# Altium PCB Pcb_2layer_8x4_Template_NoCenterHoles.PcbDoc
Units mm, origin at the board's own origin, x right, y up, seen from the top; angles counter-clockwise.
Board outline 205.99 x 101.85 mm, 2 copper layers (Top Layer, Bottom Layer); 17 components, 29 nets, 74 pads, 0 vias.
Unrouted connection lines stored in the file: 16.
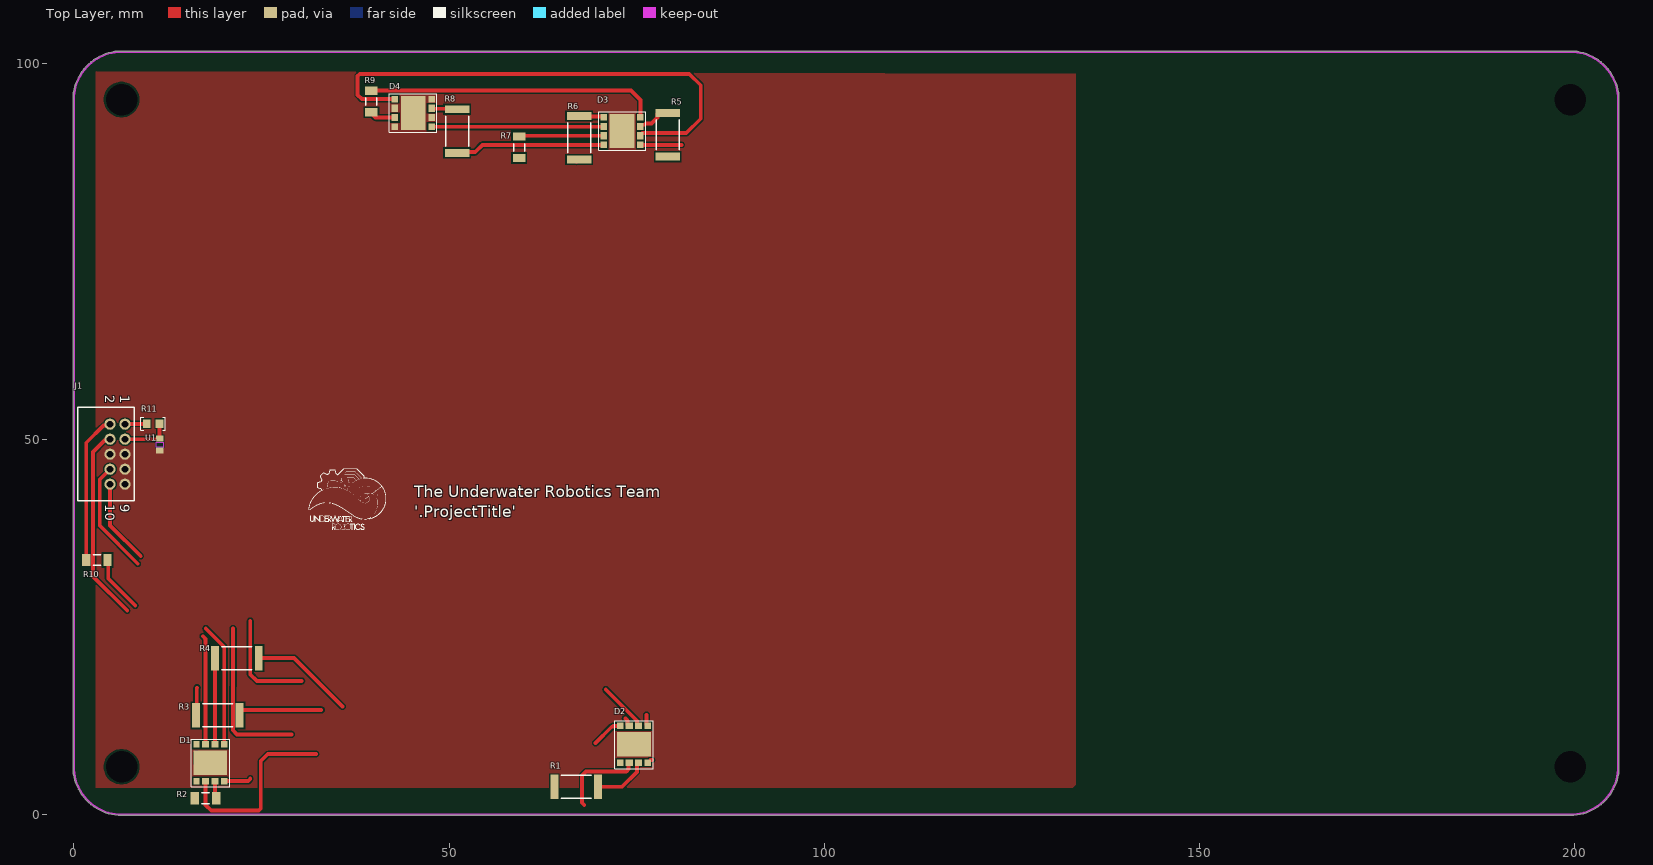
[diagram p0: Top Layer view]
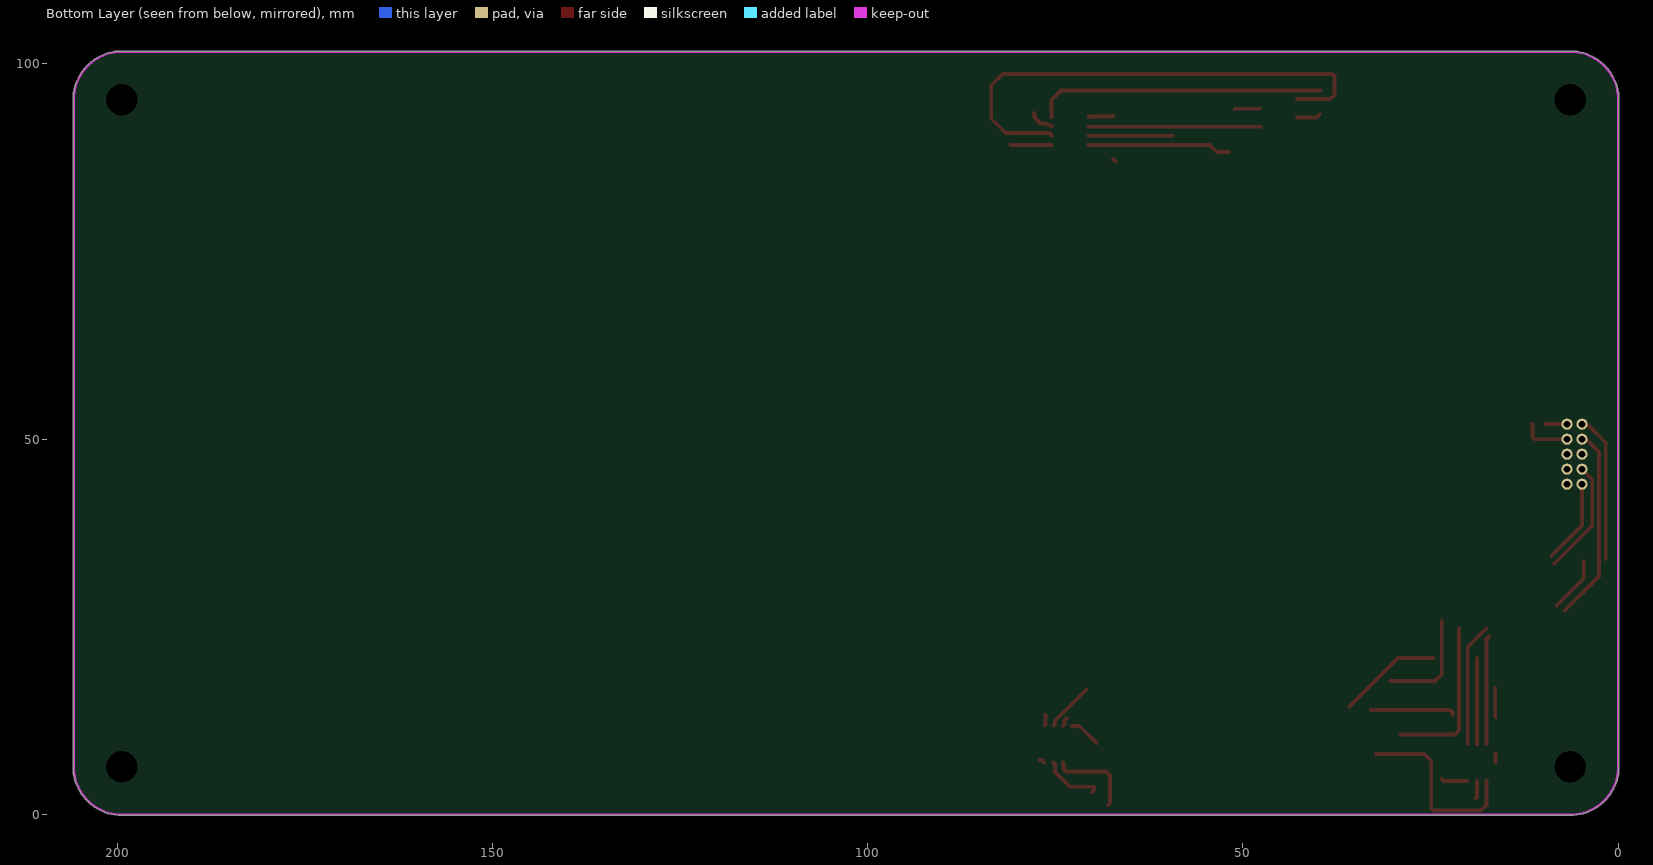
[diagram p1: Bottom Layer view, seen from below]

## Layer stack, top to bottom
Top Solder: solder mask 0.0102, Solder Resist, Dk 3.5
Top Layer: signal copper 0.0356
Dielectric 1: dielectric 0.32, FR-4, Dk 4.8
Bottom Layer: signal copper 0.0356
Bottom Solder: solder mask 0.0102, Solder Resist, Dk 3.5

## Board outline
6.35,-0.127 cw(c6.35,6.35) -0.127,6.35 -0.127,95.25 cw(c6.35,95.25) 6.35,101.727 199.39,101.727 cw(c199.39,95.25) 205.867,95.25 205.867,6.35 cw(c199.39,6.35) 199.39,-0.127

## Design rules (kind name [scope] priority, off if disabled: settings)
AcuteAngle [All] p1: minimum=6.00000000000000E+0001 checktracksonly=FALSE
BoardOutlineClearance "BoardOutlineClearance JLCPCB" [All] p1: gap=0.2 ignorepadtopadclearanceinfootprint=FALSE
Clearance "Clearance JLCPCB 4 layer" [All] p1: gap=0.2 ignorepadtopadclearanceinfootprint=FALSE except(0.09: Arc-Arc Arc-Track Track-Track; 0.127: Arc-SMDPad Track-SMDPad SMDPad-SMDPad; 0.254: Arc-Hole Track-Hole SMDPad-Hole THPad-Hole Via-Hole Fill-Hole Poly-Hole Region-Hole Text-Hole)
DiffPairsRouting [All] p1: maxlimit=0.254 minlimit=0.152 mostfreqgap=0.203 toplayer_minwidth=0.09 toplayer_maxwidth=0.381 toplayer_prefwidth=0.203 bottomlayer_minwidth=0.09 bottomlayer_maxwidth=0.381 bottomlayer_prefwidth=0.203 maxuncoupledlength=12.7
HoleSize "HoleSize JLCPCB Pad" [IsPad] p1: absolutevalues=TRUE maxlimit=6.3 minlimit=0.5 maxpercent=80.000 minpercent=20.000
HoleSize "HoleSize JLCPCB 4 layer" [All] p2: absolutevalues=TRUE maxlimit=6.3 minlimit=0.2 maxpercent=80.000 minpercent=20.000
HoleToHoleClearance "HoleToHoleClearance JLCPCB" [All] p1: gap=0.254 allowstackedmicrovias=TRUE
MinimumAnnularRing "MinimumAnnularRing JLCPCB Pad" [IsPad] p1: minimumring=0.3
MinimumAnnularRing "MinimumAnnularRing JLCPCB 1oz" [All] p2: minimumring=0.13
MinimumSolderMaskSliver [All] p1: minsoldermaskwidth=0.025
PlaneConnect [All] p1: pad.planeconnectstyle=Relief pad.reliefexpansion=0.508 pad.reliefentries=4 pad.reliefconductorwidth=0.254 pad.reliefairgap=0.254 via.planeconnectstyle=Direct via.reliefexpansion=0.508 via.reliefentries=4 via.reliefconductorwidth=0.254 via.reliefairgap=0.254
PolygonConnect [All] p1: connectstyle=Direct reliefconductorwidth=0.381 reliefentries=4 polygonreliefangle="45 Angle" airgapwidth=0.254
RoutingVias "RoutingVias JLCPCB 4 layer" [All] p1: holewidth=0.5 width=1 viastyle="Through Hole" minholewidth=0.2 minwidth=0.4 maxholewidth=1.27 maxwidth=2.032
SilkToSilkClearance [All] p1: silktosilkclearance=0.076
SilkToSolderMaskClearance "SilkToSolderMaskClearance JLCPCB" [IsPad] p1: minsilkscreentomaskgap=0.15 clearancetoexposedcopper=TRUE
SolderMaskExpansion "SolderMaskExpansion JLCPCB" [All] p1: expansion=0.05 istentingtop=FALSE
Width "Width JLCPCB 4 layer" [All] p1: maxlimit=5 minlimit=0.09 preferedwidth=0.508 bottomlayer_prefwidth=0.25 minimp=50.000000 maximp=50.000000 favimp=50.000000
23 further rules are at their usual default settings.

## Components (designator, comment, footprint, x,y, rotation, side; value= is the part's Value field where it differs from the comment)
D1 "LE_RTDUW_S2WM" LE_RTDUW_S2WM 18.171,6.896 r0 top
D2 "LE_RTDUW_S2WM" LE_RTDUW_S2WM 74.615,9.36 r0 top
D3 "LE_RTDUW_S2WM" LE_RTDUW_S2WM 73.025,91.059 r90 top
D4 "LE_RTDUW_S2WM" LE_RTDUW_S2WM 45.212,93.472 r270 top
J1 "10pos 3.8A conn" SAMTEC-LS2-105-01-X-D-RA2 8.997,55.245 r270 top
R1 "Jumper 2512(6432)" RESC2512(6432)_L 66.908,3.683 r180 top value="0.00 Ohm"
R2 "ERJ-8GEY0R00V" RESC3216X70X50NL05T20 17.526,2.159 r0 top
R3 "Jumper 2512(6432)" RESC2512(6432)_L 19.177,13.208 r0 top value="0.00 Ohm"
R4 "Jumper 2512(6432)" RESC2512(6432)_L 21.717,20.828 r0 top value="0.00 Ohm"
R5 "Jumper 2512(6432)" RESC2512(6432)_L 79.121,90.551 r270 top value="0.00 Ohm"
R6 "Jumper 2512(6432)" RESC2512(6432)_L 67.31,90.17 r90 top value="0.00 Ohm"
R7 "ERJ-8GEY0R00V" RESC3216X70X50NL05T20 59.309,88.9 r90 top
R8 "Jumper 2512(6432)" RESC2512(6432)_L 51.054,91.059 r90 top value="0.00 Ohm"
R9 "ERJ-8GEY0R00V" RESC3216X70X50NL05T20 39.624,94.996 r90 top
R10 "ERJ-8GEY0R00V" RESC3216X70X50NL05T20 3.048,33.909 r0 top
R11 "10k Ohm 0.5% 1/10W" RESISTOR_0603 10.541,52.07 r180 top
U1 "NTCS0603E3223FMT" NTCS0603_VIS 11.43,49.276 r270 top

## Footprints (in the part's own frame and the unit in brackets; to place one, negate y for a bottom-side part, rotate by r counter-clockwise, add the part's x,y. Pads: shape width x height; smd on the part's side, far side on the other; paste and mask are expansions set on the pad)
LE_RTDUW_S2WM [mil]
  rect 33.5x33.5 smd: 1(72.6,-96.5) 4(-72.6,-96.5) 5(-72.6,96.5) 8(72.6,96.5)
  rect 37.4x33.5 smd: 2(24.6,-96.5) 3(-24.6,-96.5) 6(-24.6,96.5) 7(24.6,96.5)
  rect 177.17x129.92 smd: 9(0,0)
  silkscreen extent -101,-125 101,123, body extent -93,-113 91,113, height 52
NTCS0603_VIS [mm]
  rect 0.8x1 smd paste+0 mask+0: 1(-0.8,0) 2(0.8,0)
  Top Layer keep-out region: -0.349,-0.449 -0.349,0.449 0.349,0.449 0.349,-0.449
  body extent -0.88,-0.47 0.88,0.47, height 0.94
RESC2512(6432)_L [mm] "Chip Resistor, Body 6.4x3.2mm, IPC High Density"
  rect 1.05x3.25 smd: 1(-2.9,0) 2(2.9,0)
  silkscreen extent -2,-1.52 2,1.53, body extent -3.25,-1.7 3.25,1.7, height 0.75
RESC3216X70X50NL05T20 [mm] "Chip Resistor, 2-Leads, Body 3.20x1.60mm, IPC Medium Density"
  rect 1.1x1.65 smd: 1(-1.425,0) 2(1.425,0)
  silkscreen extent -0.5,-0.72 0.5,0.72, body extent -1.63,-0.82 1.62,0.82, height 0.7
RESISTOR_0603 [mil] "Resistor 0603"
  rect 40x45 smd: 1(-33.5,0) 2(33.5,0)
  silkscreen extent -65,-35 65,35, body extent -31,-16 32,16, height 16
SAMTEC-LS2-105-01-X-D-RA2 [mm]
  round 1.49 hole 0.89 mask+0: 1(3.239,-2.191) 2(3.239,-4.191) 3(5.239,-2.191) 4(5.239,-4.191) 5(7.239,-2.191) 6(7.239,-4.191) 7(9.239,-2.191) 8(9.239,-4.191) 9(11.239,-2.191) 10(11.239,-4.191)
  silkscreen extent 1.01,-8.51 13.47,-0.99

## Part data
D1 D2 D3 D4: "LED OSTAR RGBW 625/527/453NM SMD", Supplier Part Number 1=720-LERTDUWS2WMA2120, Supplier 1=Mouser
J1: library part SAMTEC-LS2-105-01-X-D-RA2, "10 Position Connector Self Mating, Non-Gendered, Hermaphroditic Through Hole, Right Angle Gold", Package=None, Supplier Part Number 1=200-LS210501FDRA2, Availability=Unavailable, MP=SAMTEC-LS2-105-01-X-D-RA2, Price=None, Supplier 1=Mouser
R1 R3 R4 R5 R6 R8: library part CMP-1018-00001-1, "Jumper 2512 (6432 Metric)", Case-EIA=2512, Case-Metric=6432, Power=None, Technology=SMT, Tolerance=None
R2 R7 R9 R10: library part CMP-2003-00541-1, Manufacturer=Panasonic, Part Number=ERJ-8GEY0R00V
R11: library part RESISTOR_10K_0.5%_0603, "RES 10k OHM 0.5% 1/10W 0603", Digikey Part Numer=CR0603-JW-104ELFTR-ND, Supplier Part Number 1=749-1695-1-ND, Tolerance="+/- 0.5%", Value  (Ohms)=10K, Made By="Robert Pafford", Supplier=Digikey, Supplier 1=Digi-Key, Wattage=1/10W
U1: library part CMP-00030-42631939-1, "NTCS0603E3223FMT Thermistor NTC 22K Ohm 1% 2-Pin 0603 Surface Mount Solder Pad 3730K -4.5 to -4 T/R Automotive", Case Code (Imperial)=0603, Case Code (Metric)=1608, Max Operating Temperature=150°C, Min Operating Temperature=-40°C, Power Dissipation=125mW, Resistance=22kΩ, Tolerance=1%, Accuracy=1%, Case/Package=0603, Contact Plating=Tin, Depth=800µm, Height=800µm, Length=1.6mm, Mount="Surface Mount", NexarPartId=42631939, Number of Pins=2, Power Rating=125mW, Radiation Hardening=No, REACH SVHC=Unknown, RoHS=Compliant, Schedule B="8533400080, 8533400080", Termination=SMD/SMT, Width=1.6mm

## Free pads (board coordinates)
  round 1.524 hole 4.191: 1(6.35,6.35) 1(6.35,95.25) 1(199.39,6.35) 1(199.39,95.25)

## Nets (pads, with @x,y where several pads share a name; then routed paths per layer and width w, separated by ;. In a path a pad name is that pad's centre, name@x,y a point inside that pad or via, vN(x,y) a via of type N, cw(c..) or ccw(c..) an arc to the next point about the centre after c; other vN are vias at no path point)
3V3: J1.1 R11.2 | length 2.9
  Top Layer w0.508: J1.1 6.838,52.038 9.658,52.038 R11.2
"Blue Anode": D1.6 J1.8 | length 29.8
  Top Layer w0.508: J1.8 3.429,44.629 3.429,38.481 8.509,33.401 ; 17.199,23.749 17.546,23.402 D1.6
"Blue D1D2": D2.6 R3.2 | length 12.7
  Top Layer w0.508: R3.2 22.077,13.668 22.348,13.939 32.959,13.939 ; 73.472,12.796 73.769,12.499 73.769,11.982 73.941,11.811 D2.6
"Blue D2D3": D3.6 R7.2 | length 11.3
  Top Layer w0.508: R7.2@59.309,90.434 D3.6
"Blue D3D4": D4.6 R8.2 | length 3.4
  Top Layer w0.508: D4.6 47.732,94.028 50.985,94.028 R8.2
GND: D1.9 D2.9 D3.9 D4.1 D4.3 D4.5 D4.7 D4.9 J1.5 J1.6 J1.7 J1.9 U1.2
"Green Anode": J1.2 R10.1 | length 19.7
  Top Layer w0.508: R10.1@1.645,34.036 1.645,49.524 3.939,51.818 4.618,51.818 J1.2
"Green D1D2": D1.3 D2.4 | length 25
  Top Layer w0.508: D1.3 17.546,1.25 18.288,0.508 24.594,0.508 24.892,0.806 24.892,7.112 25.832,8.052 32.258,8.052
"Green D2D3": D2.3 D3.4 | length 17
  Top Layer w0.508: 67.989,1.27 67.691,1.568 67.691,5.207 68.226,5.742 73.6,5.742 73.898,6.039 73.898,6.866 D2.3@73.941,6.909 ; D3.4 80.965,89.215
"Green D3D4": D3.3 D4.4 | length 67.6
  Top Layer w0.508: D4.4 38.365,95.316 37.796,95.885 37.796,98.381 38.094,98.679 81.992,98.679 83.516,97.155 83.516,92.71 81.589,90.782 75.775,90.782 75.476,90.484 D3.3
NetD1_1: D1.1 R1.2 | length 3.6
  Top Layer w0.508: D1.1@20.095,4.445 23.224,4.445 23.495,4.716 23.495,4.826
NetD1_2: D1.2 R2.2 | length 2.4
  Top Layer w0.508: D1.2@18.786,4.445 18.786,2.324 R2.2
NetD1_4: D1.4 R10.2 | length 8.5
  Top Layer w0.508: R10.2@4.572,33.782 4.572,31.439 8.163,27.848 ; 16.327,6.929 16.327,8.052
NetD1_5: D1.5 R3.1 | length 4
  Top Layer w0.508: R3.1@16.327,12.954 16.366,12.992 16.366,16.853 16.404,16.891
NetD1_7: D1.7 R4.1 | length 11.5
  Top Layer w0.508: D1.7@18.807,9.347 18.807,20.817 R4.1
NetD2_1: D2.1 R5.2 | length 0.7
  Top Layer w0.508: D2.1 76.808,7.257 77.051,7.257
NetD2_5: D2.5 R7.1 | length 25.8
  Top Layer w0.508: 21.209,24.765 21.209,17.061 21.171,17.023 21.171,11.214 21.717,10.668 28.988,10.668 ; 69.501,9.525 71.66,11.684 71.804,11.684 71.895,11.775 72.735,11.775 D2.5
NetD2_7: D2.7 R6.1 | length 21.4
  Top Layer w0.508: 23.495,25.781 23.495,18.669 24.384,17.78 30.353,17.78 ; R6.1@66.977,86.999 67.248,87.27 R6.1 ; 70.866,16.637 75.019,12.484 75.019,11.982 D2.7@75.19,11.811
NetD3_1: D3.1 R9.2 | length 38.7
  Top Layer w0.508: R9.2@39.624,96.449 74.239,96.449 75.476,95.212 D3.1
NetD3_5: D3.5 R8.1 | length 19.2
  Top Layer w0.508: R8.1@51.816,88.265 53.467,88.265 54.417,89.215 D3.5
"Red Anode": J1.4 R2.1 | length 26
  Top Layer w0.508: J1.4 4.618,49.818 4.085,49.818 2.554,48.287 2.554,31.712 7.1,27.166
"Red D1D2": D2.2 R1.1 | length 8.2
  Top Layer w0.508: R1.1 69.808,3.24 R1.1@70.079,2.969 ; R1.1@69.829,3.683 73.025,3.683 75.019,5.677 75.019,6.737 75.19,6.909 D2.2
"Red D2D3": D3.2 R5.1 | length 3.4
  Top Layer w0.508: D3.2 75.476,91.733 75.648,91.905 76.03,91.905 76.2,92.075 76.962,92.075 77.75,92.863 77.75,93.371 R5.1@77.851,93.472
"Red D3D4": D4.2 R9.1 | length 3.2
  Top Layer w0.508: R9.1@39.751,93.275 40.179,92.847 D4.2
Temp: J1.3 R11.1 U1.1 | length 6.5
  Top Layer w0.508: J1.3 11.094,50.006 11.392,50.304 R11.1
"White Anode": D1.8 J1.10 | length 27.7
  Top Layer w0.508: J1.10 4.806,38.501 8.89,34.417 ; 17.569,24.765 20.015,22.319 D1.8
"White D1D2": D2.8 R4.2 | length 15.3
  Top Layer w0.508: R4.2 29.337,20.828 35.775,14.39 ; 76.288,13.247 76.288,11.982 D2.8
"White D2D3": D3.8 R6.2 | length 3.3
  Top Layer w0.508: R6.2 67.393,92.987 69.716,92.987 70.49,92.987 D3.8
"White D3D4": D3.7 D4.8 | length 22.9
  Top Layer w0.508: D4.8@47.625,91.628 D3.7@70.574,91.628

## Polygon pours and split planes (outlines as drawn)
GND on Top Layer "GND_L01_P000" (solid, remove dead copper, pour order 0): 2.921,99.06 2.921,3.556 133.096,3.556 133.477,3.937 133.477,98.679

## Keep-outs
Keep-Out Layer:
  lines w0.254: 95.25,0 6.35,0 ; 6.35,0 cw(c6.35,6.35) 0,6.35 0,95.25 cw(c6.35,95.25) 6.35,101.6 199.39,101.6 cw(c199.39,95.25) 205.74,95.25 205.74,6.35 cw(c199.39,6.35) 199.39,0 6.35,0

## Silkscreen, mask and mechanical layers (free items; w line width, h text height)
Top Overlay:
  drawing of 19 lines, arcs and shapes, not listed
  text "The Underwater Robotics Team" at 45.339,42.291 h1.52
  text "'.ProjectTitle'" at 45.339,39.624 h1.52

## Text inside footprints (layer, text, board x,y; h text height)
J1: Top Overlay "1" at 6.171,55.862 h1.27 r270; Top Overlay "2" at 4.171,55.862 h1.27 r270; Top Overlay "9" at 6.171,41.306 h1.27 r270; Top Overlay "10" at 4.171,41.306 h1.27 r270